# Altium PCB pcb_Hakko907-Controler_2021-11-16.pcbdoc
Units mm, origin at the board's own origin, x right, y up, seen from the top; angles counter-clockwise.
Board outline 170.43 x 88.26 mm, 2 copper layers (Top Layer, Bottom Layer); 54 components, 54 nets, 184 pads, 4 vias.
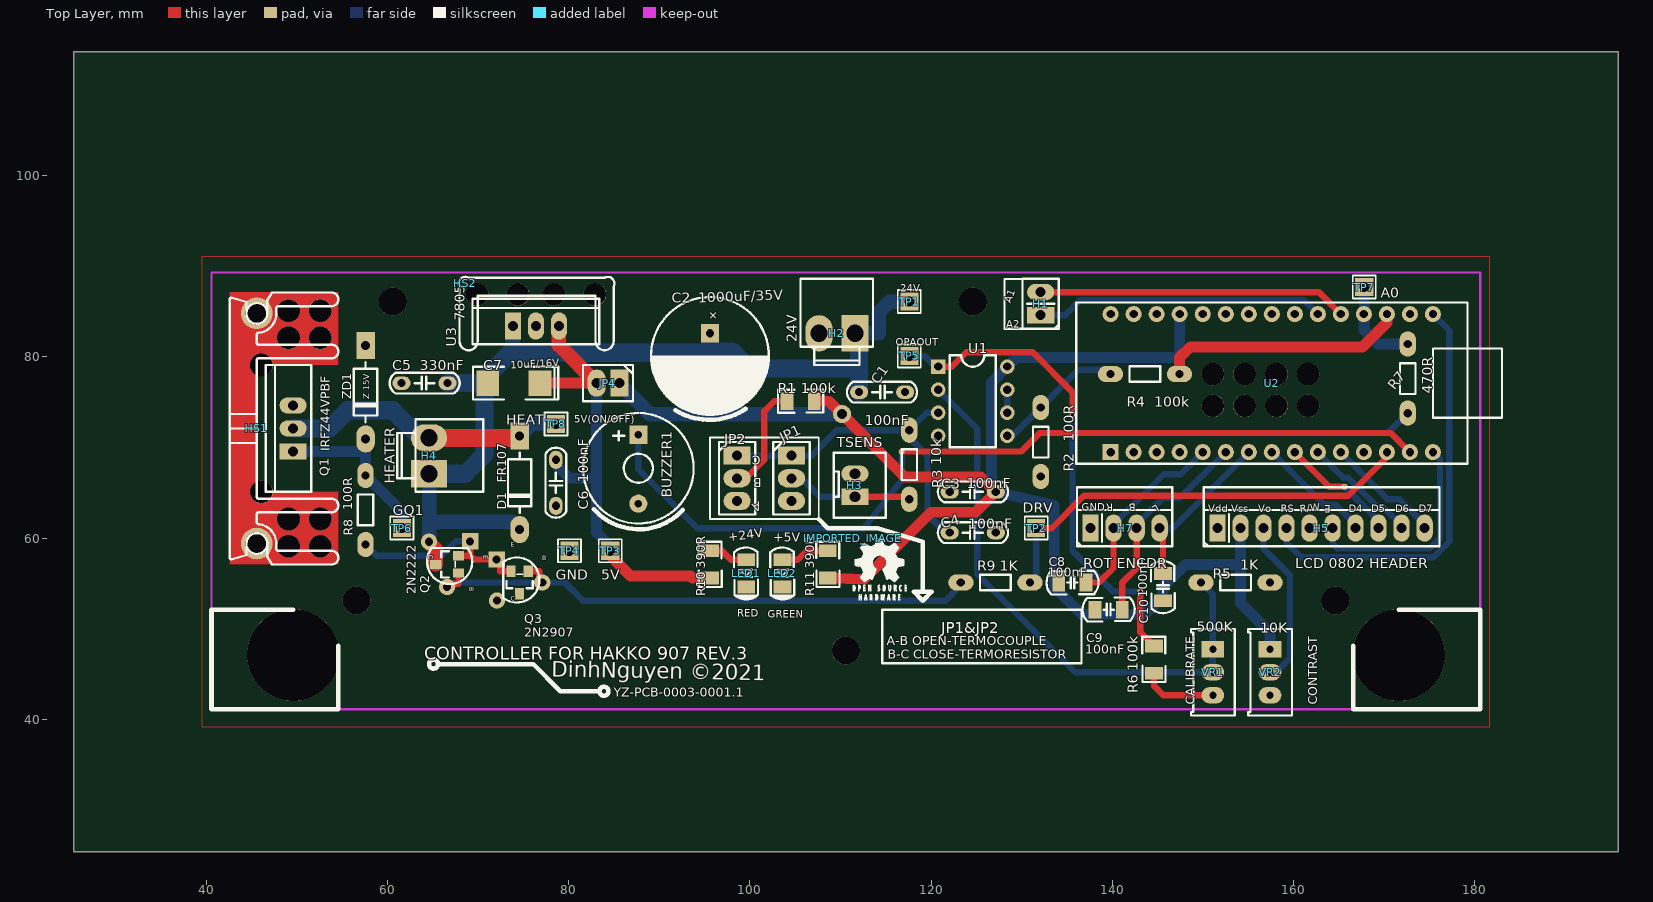
[diagram p0: Top Layer view]
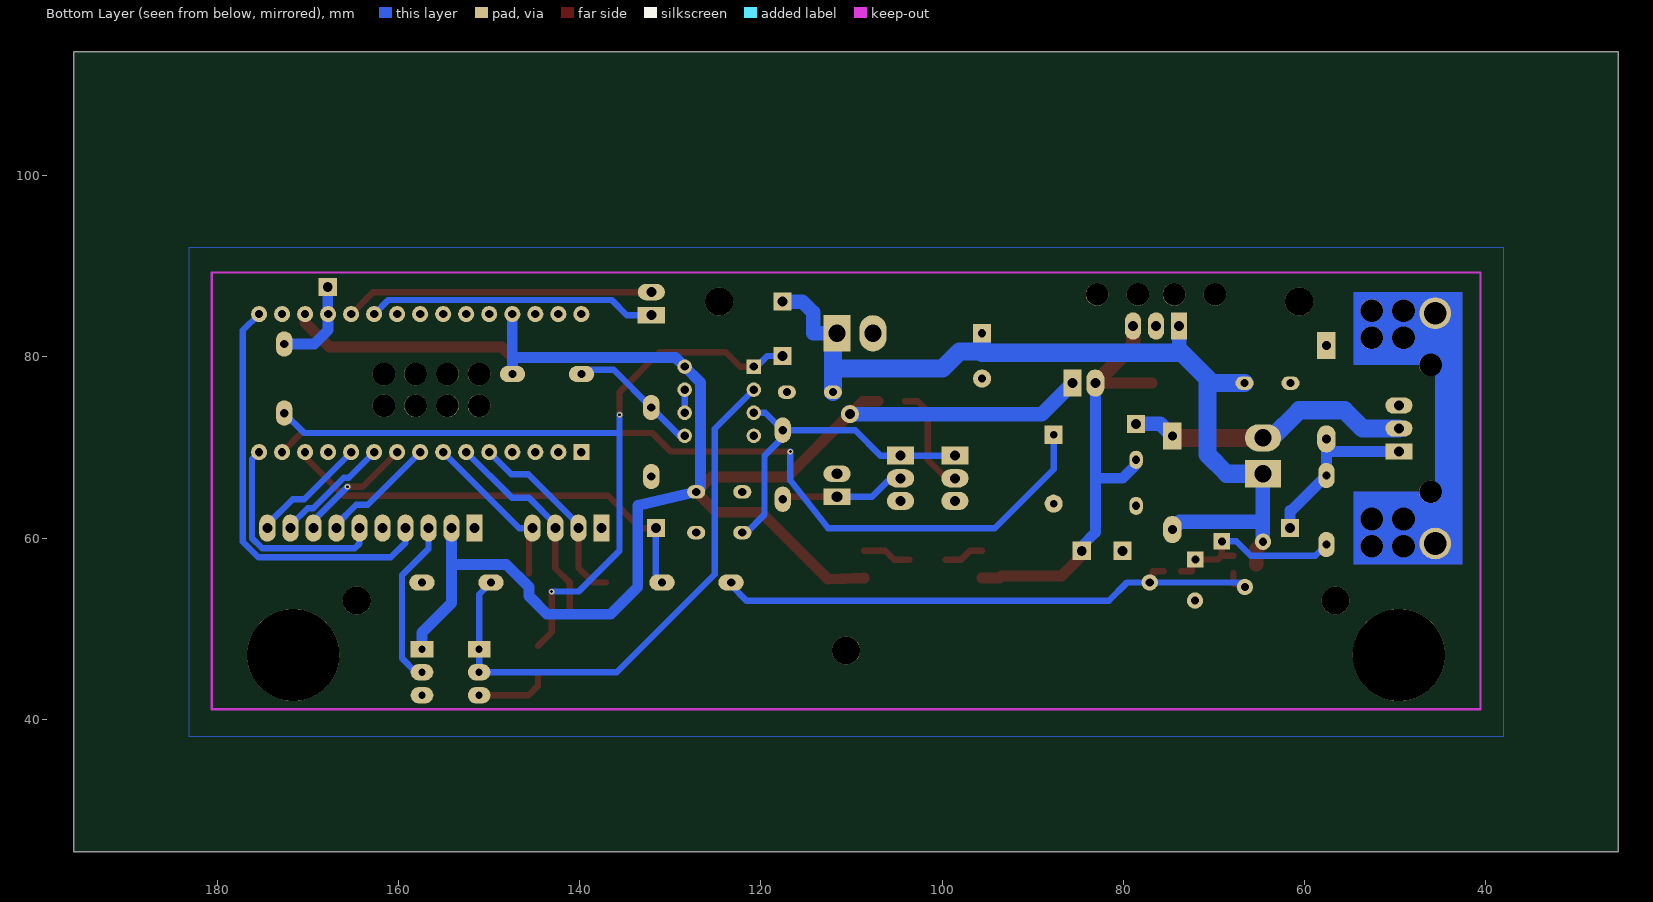
[diagram p1: Bottom Layer view, seen from below]

## Layer stack, top to bottom
Top Layer: signal copper (thickness not stored)
Dielectric: dielectric 0.32, FR-4, Dk 4.8
Bottom Layer: signal copper (thickness not stored)

## Board outline
195.827,25.4 25.4,25.4 25.4,113.663 195.827,113.663

## Components (designator, comment, footprint, x,y, rotation, side; value= is the part's Value field where it differs from the comment)
BUZZER1 "LD-BZEG-1203" BUZZER-LD-BZEG-1203 87.7,67.6 r90 top
C1 "100nF" CERAMIC-5.08-NEW 114.6,76.101 r0 top
C2 "1000uF/35V" CPOL_5_D13_V20.5 95.6,80.099 r270 top
C3 "100nF" CERAMIC-5.08-NEW 124.6,65.1 r180 top
C4 "100nF" CERAMIC-5.08-NEW 124.6,60.6 r180 top
C5 "330nF" CERAMIC-5.08-NEW 64.1,77.1 r180 top
C6 "100nF" CERAMIC-5.08-NEW 78.6,66.1 r270 top
C7 "10uF/16V" CASE-C_6032-NEW 73.45,77.1 r0 top
C8 "100nF" C_1206 135.6,55.1 r180 top
C9 "100nF" C_1206 139.6,52.1 r0 top
C10 "100nF" C_1206 145.6,54.6 r90 top
D1 "FR107" DO-41_10MM 74.6,66.1 r270 top
H1 "A1_A2" DIP-1X2P-2.54MM-M-OVAL_PAD 132.1,84.6 r90 top
H2 "24V" B2P_VH_M-3.96 111.6,82.601 r180 top
H3 "TSENS" XH_PW10-02-M_2.54MM 111.6,67.1 r270 top
H4 "HEATER" B2P_VH_M-3.96 64.6,67.1 r90 top
H5 "LCD 0802 HEADER" DIP-1X10P-2.54MM-M-OVAL_PAD 151.6,61.1 r0 top
H7 "ROT ENCDR" DIP-1X4P-2.54MM-M-OVAL_PAD 137.6,61.1 r0 top
HS1 "HEATSINK" HEATSINK-25X29X12MM 45.6,72.1 r270 top
HS2 "HEATSINK-NO PIN" "HEATSINK 8X17.4X25.5" 68.6,88.1 r0 top
IMPORTED_IMAGE "IMPORTED_IMAGE" IMPORTED_IMAGE 111.333,60.004 r0 top
JP1 "JUMPER" 1X03_JUMPER 104.6,69.1 r270 top
JP2 "JUMPER" 1X03_JUMPER 98.6,69.1 r270 top
JP4 "5V" 1X02_JUMPER 85.6,77.1 r180 top
LED1 "RED" LED_1206_RED 99.6,56.1 r90 top
LED2 "GREEN" LED_1206_GREEN 103.6,56.1 r90 top
Q1 "IRFZ44VPBF" TO-220_V 49.6,72.1 r90 top
Q2 "2N2222" SOT-23_TO-92 66.6,57.1 r90 top
Q3 "2N2907" SOT-23_TO-92 74.6,55.1 r180 top
R1 "100k" R_1206 105.601,75.1 r0 top
R2 "100R" "AXIAL-0.3-OVAL PAD" 132.1,70.6 r90 top
R3 "10k" "AXIAL-0.3-OVAL PAD" 117.6,68.1 r90 top
R4 "100k" "AXIAL-0.3-OVAL PAD" 143.6,78.1 r0 top
R5 "1K" "AXIAL-0.3-OVAL PAD" 153.6,55.1 r180 top
R6 "100k" R_1206 144.6,46.599 r90 top
R7 "470R" "AXIAL-0.3-OVAL PAD" 172.6,77.6 r90 top
R8 "100R" "AXIAL-0.3-OVAL PAD" 57.6,63.1 r270 top
R9 "1K" "AXIAL-0.3-OVAL PAD" 127.1,55.1 r0 top
R10 "390R" R_1206 95.6,57.1 r270 top
R11 "390R" R_1206 108.6,57.1 r270 top
TP1 "24V" HDR-1X1/2.54-TEST_POINT 117.6,86.1 r0 top
TP2 "DRV" HDR-1X1/2.54-TEST_POINT 131.6,61.1 r0 top
TP3 "5V" HDR-1X1/2.54-TEST_POINT 84.6,58.6 r0 top
TP4 "GND" HDR-1X1/2.54-TEST_POINT 80.1,58.6 r0 top
TP5 "OPAOUT" HDR-1X1/2.54-TEST_POINT 117.6,80.1 r0 top
TP6 "GQ1" HDR-1X1/2.54-TEST_POINT 61.6,61.1 r0 top
TP7 "A0" HDR-1X1/2.54-TEST_POINT 167.8,87.7 r0 top
TP8 "HEAT" HDR-1X1/2.54-TEST_POINT 78.6,72.6 r0 top
U1 "MCP602-E/P" DIP-8 124.6,75.1 r270 top
U2 "ARDUINO_NANO" ARDUINO_NANO_NEW 157.6,77.1 r90 top
U3 "7805" TO-220_V 76.4,83.4 r0 top
VR1 "500K" 3296X 151.099,45.2 r0 top
VR2 "10K" 3296X 157.401,45.2 r0 top
ZD1 "Z 15V" DO-41_10MM_ZENNER 57.6,76.1 r270 top

## Footprints (in the part's own frame and the unit in brackets; to place one, negate y for a bottom-side part, rotate by r counter-clockwise, add the part's x,y. Pads: shape width x height; smd on the part's side, far side on the other; paste and mask are expansions set on the pad)
1X02_JUMPER [mm]
  rect 2x3 hole 1.1: 1(0,0)
  oval 2x3 hole 1.1: 2(2.5,0)
  silkscreen extent -1.5,-2 4,2
1X03_JUMPER [mm]
  rect 2x3 hole 1.1: 1(0,0)
  oval 2x3 hole 1.1: 2(2.5,0) 3(5,0)
  silkscreen extent -1.5,-2 6.5,2
3296X [mm]
  rect 2.5x1.8 hole 0.8: 1(0,2.54)
  oval 2.5x1.8 hole 0.8: 2(0,0) 3(0,-2.54)
  silkscreen extent -2.41,-4.77 2.42,4.76
ARDUINO_NANO_NEW [mil]
  rect 70x70 hole 36: 1(-300,700)
  round 70 hole 36: 2(-300,600) 3(-300,500) 4(-300,400) 5(-300,300) 6(-300,200) 7(-300,100) 8(-300,0) 9(-300,-100) 10(-300,-200) 11(-300,-300) 12(-300,-400) 13(-300,-500) 14(-300,-600) 15(-300,-700) 16(300,-700) 17(300,-600) 18(300,-500) 19(300,-400) 20(300,-300) 21(300,-200) 22(300,-100) 23(300,0) 24(300,100) 25(300,200) 26(300,300) 27(300,400) 28(300,500) 29(300,600) 30(300,700)
  silkscreen extent -350,-1000 350,850
"AXIAL-0.3-OVAL PAD" [mm]
  oval 2.8x1.8 hole 0.914: 1(-3.81,0) 2(3.81,0)
  silkscreen extent -1.7,-0.85 1.7,0.85
B2P_VH_M-3.96 [mm]
  rect 3x4 hole 1.9: 1(0,0)
  oval 3x4 hole 1.9: 2(3.96,0)
  silkscreen extent -2,-6 6,3.5
BUZZER-LD-BZEG-1203 [mm]
  rect 2x2 hole 0.8: 1(3.8,0)
  round 2 hole 0.8: 2(-3.8,0)
  silkscreen extent -6.63,-6.1 6.2,6.09
C_1206 [mm]
  rect 1.4x1.95 smd: 1(-1.5,0) 2(1.5,0)
  silkscreen extent -2.89,-1.3 2.86,1.34
CASE-C_6032-NEW [mm]
  rect 2.5x2.8 smd: 1(3.4,0) 2(-2.35,0)
  silkscreen extent -4,-1.8 5.4,1.8
CERAMIC-5.08-NEW [mm]
  oval 2x1.5 hole 0.9: 1(-2.54,0) 2(2.54,0)
  silkscreen extent -3.88,-1.14 3.85,1.14
CPOL_5_D13_V20.5 [mm]
  rect 2x2 hole 0.9: 1(-2.501,0)
  round 2 hole 0.9: 2(2.5,0)
  silkscreen extent -6.5,-6.5 7.05,6.5
DIP-1X2P-2.54MM-M-OVAL_PAD [mm]
  rect 1.8x3 hole 1.1: 1(0,0)
  oval 1.8x3 hole 1.1: 2(2.54,0)
  silkscreen extent -1.5,-2 4,2
DIP-1X4P-2.54MM-M-OVAL_PAD [mm]
  rect 1.8x3 hole 1.1: 1(0,0)
  oval 1.8x3 hole 1.1: 2(2.54,0) 3(5.08,0) 4(7.62,0)
  silkscreen extent -1.5,-2 9,2
DIP-1X10P-2.54MM-M-OVAL_PAD [mm]
  rect 1.8x3 hole 1.1: 1(0,0)
  oval 1.8x3 hole 1.1: 2(2.54,0) 3(5.08,0) 4(7.62,0) 5(10.16,0) 6(12.7,0) 7(15.24,0) 8(17.78,0) 9(20.32,0) 10(22.86,0)
  silkscreen extent -1.5,-2 24.5,2
DIP-8 [mil]
  rect 63x63 hole 35: 1(-150,-150)
  round 63 hole 35: 2(-50,-150) 3(50,-150) 4(150,-150) 5(150,150) 6(50,150) 7(-50,150) 8(-150,150)
  silkscreen extent -200,-100 200,100
DO-41_10MM [mil]
  rect 118.11x80 hole 40: 1(-203.2,0)
  oval 118.11x80 hole 40: 2(203.2,0)
  silkscreen extent -130,-51 130,51
DO-41_10MM_ZENNER [mil]
  rect 118.11x80 hole 40: 1(-203.2,0)
  oval 118.11x80 hole 40 unplated: 2(203.2,0)
  silkscreen extent -130,-51 130,51
HDR-1X1/2.54-TEST_POINT [mm]
  rect 2x2 hole 1.1: 1(0,0)
  silkscreen extent -1.27,-1.27 1.27,1.27
"HEATSINK 8X17.4X25.5" [mm]
  silkscreen extent -0.73,-7.38 16.46,0.73
HEATSINK-25X29X12MM [mm]
  round 3.5 hole 2.5: 1(-12.7,0) 1(12.7,0)
  silkscreen extent -14.99,-3 15.01,9
IMPORTED_IMAGE [mm]
  silkscreen extent 0,-6.89 5.99,0
LED_1206_GREEN [mm]
  rect 1.4x1.95 smd: 1(1.5,0) 2(-1.5,0)
  silkscreen extent -2.89,-1.3 2.86,1.34
LED_1206_RED [mm]
  rect 1.4x1.95 smd: 1(1.5,0) 2(-1.5,0)
  silkscreen extent -2.89,-1.3 2.86,1.34
R_1206 [mm]
  rect 1.4x1.95 smd: 1(-1.5,0) 2(1.5,0)
  silkscreen extent -2.49,-1.27 2.5,1.3
SOT-23_TO-92 [mm]
  rect 1x1.25 smd: 1(0.95,-1.25) 2(-0.95,-1.25) 3(0,1.25)
  rect 1.8x1.8 hole 0.9: 1(2.54,-2.54)
  round 1.8 hole 0.9: 2(-2.5,0) 3(2.5,2)
  silkscreen extent -2.18,-2.76 1.8,2.2
TO-220_V [mm]
  rect 1.8x3 hole 1.1: 1(-2.54,0)
  oval 1.8x3 hole 1.1: 2(0,0) 3(2.54,0)
  silkscreen extent -7,-2 7,3
XH_PW10-02-M_2.54MM [mm]
  rect 1.8x3 hole 1.2: 1(2.54,0)
  oval 1.8x3 hole 1.2: 2(0,0)
  silkscreen extent -2.33,-2.35 4.87,3.4

## Free pads (board coordinates)
  round 2 hole 1.1: 2(110.174,73.679)
  round 2.5 hole 2.5 unplated: ""(46.1,65.1) ""(46.1,79.1) ""(49.1,59.1) ""(49.1,62.1) ""(49.1,82.1) ""(49.1,85.1) ""(52.6,59.1) ""(52.6,62.1) ""(52.6,82.1) ""(52.6,85.1) ""(69.9,86.9) ""(74.4,86.9) ""(78.4,86.9) ""(82.9,86.9) ""(151.1,74.6) ""(151.1,78.1) ""(154.6,74.6) ""(154.6,78.1) ""(158.1,74.6) ""(158.1,78.1) ""(161.6,74.6) ""(161.6,78.1)
  round 10.2 hole 10.2 unplated: ""(49.6,47.1) ""(171.6,47.1)
  round 3.1 hole 3.1 unplated: ""(56.6,53.1) ""(60.6,86.1) ""(110.6,47.6) ""(124.6,86.1) ""(164.6,53.1)

## Via types
v1: diameter 0.61, hole 0.31, Top Layer to Bottom Layer, 4 vias

## Nets (pads, with @x,y where several pads share a name; then routed paths per layer and width w, separated by ;. In a path a pad name is that pad's centre, name@x,y a point inside that pad or via, vN(x,y) a via of type N, cw(c..) or ccw(c..) an arc to the next point about the centre after c; other vN are vias at no path point)
+5V: C3.1 H5.2 JP4.1 pad.2 R1.2 R4.2 R11.2 U1.8 U2.18 U2.27 VR2.1 | length 196.8
  Top Layer w1.2: R1.2 108.753,75.1 pad.2 117.099,66.751 125.489,66.751 C3.1 124.889,62.85 120,62.85 112.601,55.461 R11.2 ; R4.2@147.411,78.1 147.411,79.911 148.6,81.1 167.599,81.1 170.299,83.8 U2.18
  Bottom Layer w1.2: R4.2@147.411,78.1 147.411,79.929 ; U2.27 147.439,79.959 147.411,79.929 ; 154.14,58.26 154.14,57.099 148.1,57.099 145.6,54.6 145.6,53.599 143.599,51.6 136.596,51.6 133.599,54.598 133.599,63.599 C3.1 126.682,65.558 126.682,77.181 U1.8 129.431,79.929 147.411,79.929 ; H5.2 154.14,56.957 154.14,52.85 157.401,49.589 VR2.1
  Bottom Layer w1.6: JP4.1 89.022,73.678 pad.2
+24V: C1.1 C2.1 C5.1 D1.2 H2.1 H4.1 Q2.3 TP1.1 U3.1 | length 108.3
  Top Layer w1.6: Q2.3@64.6,59.599 64.6,59.5 65.352,58.75 Q2.3@65.352,57.099
  Bottom Layer w1.6: Q2.3@64.6,59.599 64.6,61.776 ; H4.1 64.6,61.776 ; 73.861,80.749 U3.1@73.861,83.399 ; D1.2@74.6,60.937 73.762,61.776 64.6,61.776 ; C2.1@95.6,82.598 95.6,80.45 C2.1 ; H2.1 114.252,82.601 114.252,84.902 115.451,86.101 TP1.1
  Bottom Layer w2: H4.1 68.6,67.1 70.711,69.211 70.711,77.6 ; C5.1 70.211,77.1 73.861,80.749 ; 73.861,80.45 95.6,80.45 C2.1 ; 95.6,80.6 98.1,80.6 99.99,78.71 112.06,78.71 ; H2.1 112.06,82.141 C1.1
A1: H1.2 U2.20 | length 34.1
  Top Layer w0.7: H1.2 162.801,87.14 U2.20
A2: H1.1 U2.21 | length 31.9
  Bottom Layer w0.7: H1.1 134.79,84.6 136.469,86.279 161.122,86.279 U2.21
BUZZ: BUZZER1.1 U2.14 | length 99.1
  Top Layer w0.7: v1(116.751,69.548) 129.934,69.548 131.986,71.6 170.718,71.6 U2.14
  Bottom Layer w0.7: BUZZER1.1 87.701,67.6 94.201,61.1 112.601,61.1 116.751,66.348 v1(116.751,69.548)
D4: H5.7 U2.8 | length 12.9
  Bottom Layer w0.7: U2.8 163.398,63.683 164.655,63.683 166.84,61.499 H5.7
D5: H5.8 U2.9 | length 13.2
  Top Layer w0.7: U2.9 163.949,65.669 v1(165.621,65.669)
  Bottom Layer w0.7: v1(165.621,65.669) 169.38,61.91 H5.8
D6: H5.9 U2.10 | length 12.9
  Bottom Layer w0.7: U2.10 165.489,66.673 166.035,66.673 169.41,63.297 170.025,63.297 171.92,61.402 H5.9
D7: H5.10 U2.11 | length 12.9
  Bottom Layer w0.7: U2.11 170.401,64.3 171.661,64.3 174.46,61.501 H5.10
E: H5.6 U2.15 | length 24.1
  Bottom Layer w0.7: H5.6 164.3,59.401 164.828,58.872 175.034,58.872 176.164,60 176.164,68.697 U2.15
ENCB: C9.2 H7.3 U2.6 | length 23.2
  Top Layer w0.7: C9.2 141.1,55.1 142.68,56.68 H7.3
  Bottom Layer w0.7: H7.3 142.679,61.519 145.595,64.435 147.475,64.435 U2.6
ENCL: C10.2 H7.4 U2.7 | length 18.5
  Top Layer w0.7: H7.4 145.6,60.719 C10.2@145.6,56.099
  Bottom Layer w0.7: H7.4 146.68,61.1 U2.7
ENCR: C8.1 H7.2 U2.5 | length 21.6
  Top Layer w0.7: C8.1 138.501,55.1 140.139,56.739 H7.2
  Bottom Layer w0.7: H7.2 140.139,61.511 145.679,67.051 147.551,67.051 U2.5
GND: BUZZER1.2 C1.2 C2.2 C3.2 C4.1 C5.2 C6.2 C7.2 C8.2 C9.1 C10.1 H2.2 H3.2 H5.1 H5.5 H7.1 LED1.2 LED2.2 Q1.3 Q3.3 R2.1 R5.1 TP4.1 U1.4 U2.4 U2.29 U3.2 VR2.3 ZD1.1
HEATER: D1.1 H4.2 Q1.2 TP8.1 | length 31.7
  Top Layer w2: H4.2 74.399,71.06 D1.1
  Bottom Layer w1.6: D1.1 75.939,72.6 TP8.1
  Bottom Layer w2: Q1.2 53.6,72.1 55.6,74.1 60.6,74.1 63.64,71.06 H4.2
HS1_1: HS1.1
I2: R5.2 U1.2 VR1.1 VR1.2 | length 63.1
  Bottom Layer w0.7: U1.2 125.1,72.06 125.1,56.022 135.923,45.2 VR1.2 VR1.1 151.099,53.79 R5.2@149.791,55.1
I3: C4.2 JP1.1 JP2.1 R3.2 U1.3 | length 37.6
  Bottom Layer w0.7: JP2.1 JP1.1 106.802,69.101 109.611,71.91 R3.2 ; U1.3 119.52,73.83 R3.2 ; C4.2 121.6,60.6 119.6,62.6 119.6,69.1 117.6,71.1 R3.2
JP1_3: JP1.3
JP2_3: JP2.3
MOSFET: R9.2 TP2.1 U2.13 | length 48.8
  Top Layer w0.7: TP2.1 133.302,61.1 136.868,64.666 166.035,64.666 170.299,68.933 U2.13
  Bottom Layer w0.7: R9.2 131.6,55.789 TP2.1
NULL: 
O1: R6.2 R7.1 TP5.1 U1.1 | length 92.4
  Top Layer w0.7: U1.1 122.291,78.91 123.878,80.498 131.201,80.498 135.6,76.101 v1(135.6,73.6) ; v1(143.1,54.1) 143.1,49.6 R6.2
  Bottom Layer w0.7: TP5.1 119.301,80.099 120.49,78.91 U1.1 ; 135.6,71.602 140.099,71.6 170.411,71.6 R7.1 ; v1(135.6,73.6) 135.6,58.601 140.101,54.1 v1(143.1,54.1)
Q1G: Q1.1 R8.1 TP6.1 ZD1.2 | length 19.7
  Bottom Layer w1.2: Q1.1 57.24,69.56 57.6,69.2 ; ZD1.2@57.6,70.937 57.6,66.909 61.46,63.051 61.6,63.051 TP6.1
Q2_1: Q2.1 Q3.1 R8.2 | length 21.3
  Top Layer w0.7: Q2.1@67.851,58.049 69.177,58.049 69.586,57.64 72.06,57.64 72.448,57.252 72.448,56.35 Q3.1@73.65,56.35 ; 69.14,58.049 Q2.1@69.14,59.64
  Bottom Layer w0.7: R8.2@57.6,59.289 58.852,58.039 65.938,58.039 67.539,59.639 Q2.1@69.141,59.639
Q2_2: Q2.2 Q3.2 R9.1 | length 63.9
  Top Layer w0.7: Q2.2@66.601,54.6 66.949,54.948 67.851,54.948 Q2.2@67.851,56.149 ; Q3.2@75.55,56.35 76.751,56.35 76.751,55.448 Q3.2@77.099,55.1
  Bottom Layer w0.7: Q2.2@66.601,54.6 67.099,55.1 77.099,55.1 79.6,55.1 81.6,53.1 121.6,53.1 123.29,54.79 R9.1
R1_1: JP2.2 R1.1 | length 12.2
  Top Layer w0.7: JP2.2 99.537,66.599 101.6,68.661 101.6,74.001 102.7,75.1 R1.1
R6_1: R6.1 VR1.3 | length 8.3
  Top Layer w0.7: R6.1 144.6,43.698 145.638,42.66 VR1.3
R10_1: LED1.1 R10.1 | length 4.4
  Top Layer w0.7: R10.1 96.924,58.6 97.925,57.6 LED1.1
R11_1: LED2.1 R11.1 | length 5.4
  Top Layer w0.7: LED2.1@103.601,57.6 105.275,57.6 106.276,58.601 R11.1
RS: H5.4 U2.16 | length 46.8
  Bottom Layer w0.7: H5.4 159.22,59.479 160.83,57.869 175.45,57.869 177.17,59.589 177.17,82.931 U2.16
S$57: 
S$860: 
S$1168: 
S$1171: 
S$2595: 
SENSOR: R7.2 TP7.1 U2.19 | length 10.3
  Bottom Layer w1.2: U2.19 167.759,82.941 169.291,81.41 R7.2 ; U2.19 167.8,84.76 TP7.1
TSENS: H3.1 JP1.2 R3.1 | length 14
  Top Layer w0.7: H3.1 117.33,64.56 R3.1
  Bottom Layer w0.7: JP1.2 105.699,66.599 107.739,64.559 H3.1
U1_5: R2.2 R4.1 U1.5 | length 14.6
  Bottom Layer w0.7: U1.5 128.981,71.29 R2.2 136.256,78.565 139.324,78.565 R4.1@139.791,78.1
U1_6: U1.6 U1.7 | length 2.5
  Bottom Layer w0.7: U1.6 U1.7
U2_1: U2.1
U2_2: U2.2
U2_3: U2.3
U2_12: U2.12
U2_17: U2.17
U2_22: U2.22
U2_23: U2.23
U2_24: U2.24
U2_25: U2.25
U2_26: U2.26
U2_28: U2.28
U2_30: U2.30
V5: C6.1 C7.1 JP4.2 R10.2 TP3.1 U3.3 | length 51.6
  Top Layer w1.2: C7.1 JP4.2 ; TP3.1 84.6,58.049 85.55,57.099 86.848,55.801 93.472,55.801 93.675,55.601 R10.2
  Top Layer w1.6: U3.3@78.941,83.399 78.941,81.26 JP4.2
  Bottom Layer w1.2: C6.1 78.6,68.1 80.1,66.6 83.101,66.6 ; JP4.2 83.101,60.6 84.6,59.101 TP3.1
VO: H5.3 VR2.2 | length 18.4
  Bottom Layer w0.7: H5.3 156.68,58.816 159.606,55.893 159.606,46.726 158.079,45.2 VR2.2

## Polygon pours and split planes (outlines as drawn)
GND on Bottom Layer (solid): 38.1,92.1 38.1,38.1 183.1,38.1 183.1,92.1 38.1,92.1
GND on Top Layer (solid): 39.6,91.1 181.6,91.1 181.6,39.1 39.6,39.1 39.6,91.1

## Other copper
Top Layer:
  region net HS1_1: 42.6,87.1 54.6,87.1 54.6,79.1 50.1,79.1 45.6,79.1 45.6,65.1 54.6,65.1 54.6,57.1 48.6,57.1 42.6,57.1 42.6,87.1
Bottom Layer:
  region net HS1_1: 42.6,87.1 54.6,87.1 54.6,79.1 50.1,79.1 45.6,79.1 45.6,65.1 54.6,65.1 54.6,57.1 42.6,57.1 42.6,87.1

## Silkscreen, mask and mechanical layers (free items; w line width, h text height)
Top Overlay:
  circle w0.5: c65.1,46.1 r0.5
  circle w0.5: c83.9,43.1 r0.5
  lines w0.2 net S$860: 95.6,62.101 95.6,67.099 95.6,69.101 95.6,71.1 97.599,71.1 107.599,71.1 107.599,62.101 95.6,62.101
  lines w0.254: 114.6,46.194 136.6,46.194 136.6,52.1 114.6,52.1 114.6,46.194 ; 128.1,83.1 130.1,83.1 130.1,88.6 128.1,88.6 128.1,83.1 ; 136.1,63.1 146.6,63.1 146.6,65.6 136.1,65.6 136.1,63.1 ; 150.1,63.1 176.1,63.1 176.1,65.6 150.1,65.6 150.1,63.1
  lines w0.5 net S$1168: 49.6,52.1 40.6,52.1 40.599,41.1 54.6,41.1 54.6,48.1
  lines w0.5 net S$1171: 166.6,48.1 166.6,41.1 180.6,41.1 180.6,52.1 171.6,52.1
  lines w0.5 net S$2595: 65.9,46.1 76.1,46.1 79.1,43.1 83.1,43.1
  lines w0.5 net S$860: 107.599,62.101 108.6,61.1 ; 108.6,61.1 114.099,61.1 119.1,59.6 119.101,56.101 119.101,54.1 ; 108.6,61.1 108.6,61.1 ; 119.101,54.1 118.1,54.1 119.101,53.099 120.099,54.1 119.101,54.1
  text "A1" at 128.773,85.881 h0.8 r69
  text "A2" at 128.3,83.224 h0.8
  text "5V(ON/OFF)" at 80.6,72.7 h0.8
  text "C" at 101.2,69.1 h1 r180
  text "B" at 101.3,66.6 h1 r180
  text "A" at 101.021,64.067 h1 r201
  text "R" at 140.099,63.787 h0.8 r180
  text "B" at 142.599,63.787 h0.8 r180
  text "L" at 144.899,63.734 h0.8 r210
  text "E" at 164.1,63.623 h0.8 r180
  text "GND" at 136.6,63.023 h0.8
  text "Vdd" at 150.6,62.824 h0.8
  text "Vss" at 153.101,62.824 h0.8
  text "Vo" at 156.099,62.824 h0.8
  text "RS" at 158.6,62.823 h0.8
  text "D4" at 166.1,62.823 h0.8
  text "D5" at 168.599,62.823 h0.8
  text "D6" at 171.2,62.823 h0.8
  text "D7" at 173.799,62.823 h0.8
  text "R/W" at 160.743,62.78 h0.8 r6
  text "+24V" at 97.67,59.605 h1 r8
  text "+5V" at 102.6,59.6 h1
  text "JP1&JP2" at 121.1,49.5 h1.2
  text "A-B OPEN-TERMOCOUPLE" at 115.1,48.2 h1
  text "B-C CLOSE-TERMORESISTOR" at 115.2,46.7 h1
  text "CONTROLLER FOR HAKKO 907 REV.3" at 64.1,46.6 h1.4
  text "DinhNguyen ©2021" at 78.1,44.1 h3 r359
  text "YZ-PCB-0003-0001.1" at 85,42.5 h1
  text "CALIBRATE" at 149.1,41.614 h1 r90
  text "CONTRAST" at 162.601,41.615 h1 r90
Document:
  circle w0.254: c124.6,86.2 r3.1
  circle w0.254: c124.6,86.2 r1.55
  circle w0.254: c60.6,86.2 r3.1
  circle w0.254: c60.6,86.2 r1.55
  circle w0.254: c56.6,53.2 r3.1
  circle w0.254: c56.6,53.2 r1.55
  circle w0.254: c164.6,53.2 r3.1
  circle w0.254: c164.6,53.2 r1.55
  circle w0.254: c110.6,47.7 r3.1
  circle w0.254: c110.6,47.7 r1.55
  circle w0.254: c49.6,47.2 r0.5
  circle w0.254: c171.6,47.2 r0.5
  circle w0.254: c110.6,47.7 r0.5
  circle w0.254: c124.6,86.2 r0.5
  circle w0.254: c60.6,86.2 r0.5
  circle w0.254: c164.6,53.2 r0.5
  circle w0.254: c56.6,53.2 r0.5
  lines w0.254: 48.6,47.2 50.599,47.2 ; 49.6,46.2 49.6,48.199 ; 55.6,53.2 57.599,53.2 ; 56.6,52.2 56.6,54.199 ; 59.6,86.2 61.599,86.2 ; 60.6,85.2 60.6,87.199 ; 102.3,49.25 102.3,46.297 102.32,46.139 ; 107.8,49.25 110.6,50.8 113.4,49.222 113.396,46.148 110.602,44.601 107.82,46.139 ; 109.6,47.7 111.599,47.7 ; 110.6,46.7 110.6,48.699 ; 123.6,86.2 125.599,86.2 ; 124.6,85.2 124.6,87.199 ; 163.6,53.2 165.6,53.2 ; 164.6,52.2 164.6,54.199 ; 170.6,47.2 172.599,47.2 ; 171.6,46.2 171.6,48.199 ; 49.6,42.2 cw(c49.6,47.2) 49.6,52.2 cw(c49.6,47.2) 49.6,42.2 ; 53.8,51.797 53.82,51.639 56.602,50.101 59.396,51.648 59.4,54.722 56.6,56.3 53.8,54.75 53.8,51.797 ; 56.6,51.6 ccw(c56.6,53.2) 56.6,54.8 ccw(c56.6,53.2) 56.6,51.6 ; 57.8,84.796 57.82,84.639 60.602,83.101 63.396,84.648 63.4,87.722 60.6,89.3 57.8,87.75 57.8,84.796 ; 60.6,84.6 ccw(c60.6,86.2) 60.6,87.8 ccw(c60.6,86.2) 60.6,84.6 ; 110.6,46.1 ccw(c110.6,47.7) 110.6,49.3 ccw(c110.6,47.7) 110.6,46.1 ; 121.8,84.797 121.82,84.639 124.602,83.101 127.396,84.648 127.4,87.722 124.6,89.3 121.8,87.75 121.8,84.797 ; 124.6,84.6 ccw(c124.6,86.2) 124.6,87.8 ccw(c124.6,86.2) 124.6,84.6 ; 136.1,68.1 179.1,68.1 179.1,86.1 136.1,86.1 136.1,68.1 ; 148.6,40.6 153.6,40.6 153.6,50.1 148.6,50.1 148.6,40.6 ; 155.1,40.6 159.6,40.6 159.6,50.1 155.1,50.1 155.1,40.6 ; 161.8,51.797 161.82,51.639 164.602,50.101 167.396,51.648 167.4,54.722 164.6,56.3 161.8,54.75 161.8,51.797 ; 164.6,51.6 ccw(c164.6,53.2) 164.6,54.8 ccw(c164.6,53.2) 164.6,51.6 ; 171.6,42.2 ccw(c171.6,47.2) 171.6,52.2 ccw(c171.6,47.2) 171.6,42.2

## Text inside footprints (layer, text, board x,y; h text height)
C2: Top Overlay "+" at 95.237,84.644 h1 r315
Q2: Top Overlay "B" at 69.062,54.601 h0.5 r270; Top Overlay "E" at 70.562,58.099 h0.5 r270; Top Overlay "C" at 64.564,58.101 h0.5 r270
Q3: Top Overlay "B" at 77.099,57.562 h0.5; Top Overlay "E" at 73.601,59.061 h0.5; Top Overlay "C" at 73.599,53.064 h0.5